# Altium PCB Arduino_MEGA_2560-Rev3.PcbDoc (part 1 of 2)
Units mm, origin at the board's own origin, x right, y up, seen from the top; angles counter-clockwise.
Board outline 101.6 x 53.34 mm, 2 copper layers (Top, Bottom); 63 components, 112 nets, 394 pads, 154 vias.
Unrouted connection lines stored in the file: 1.
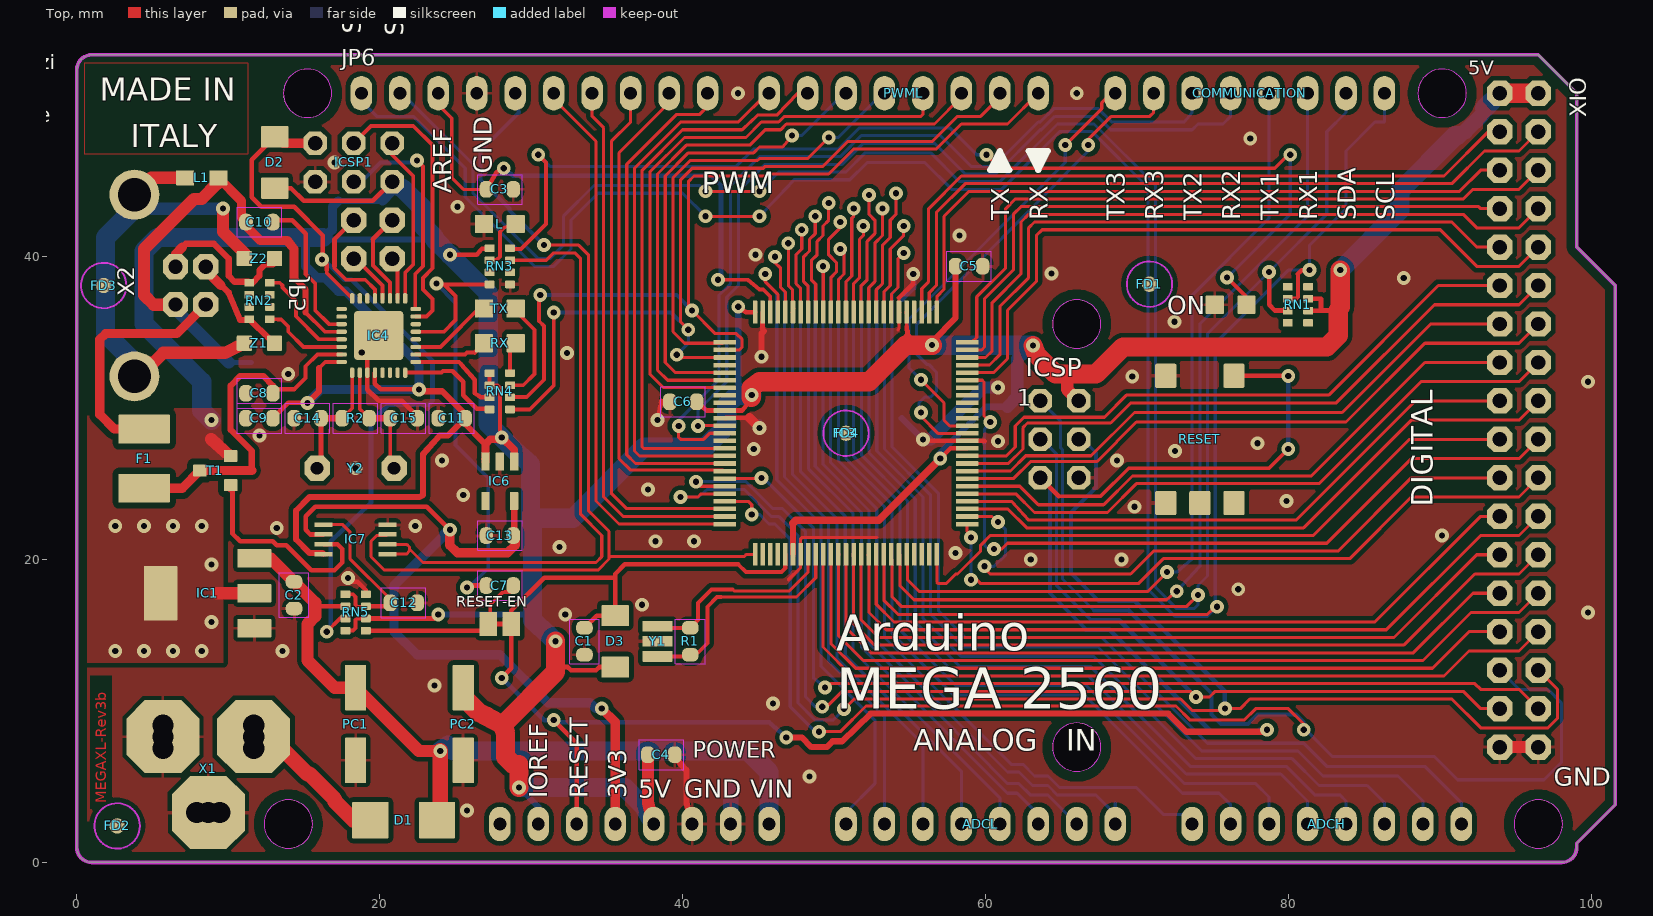
[diagram p0: Top view]
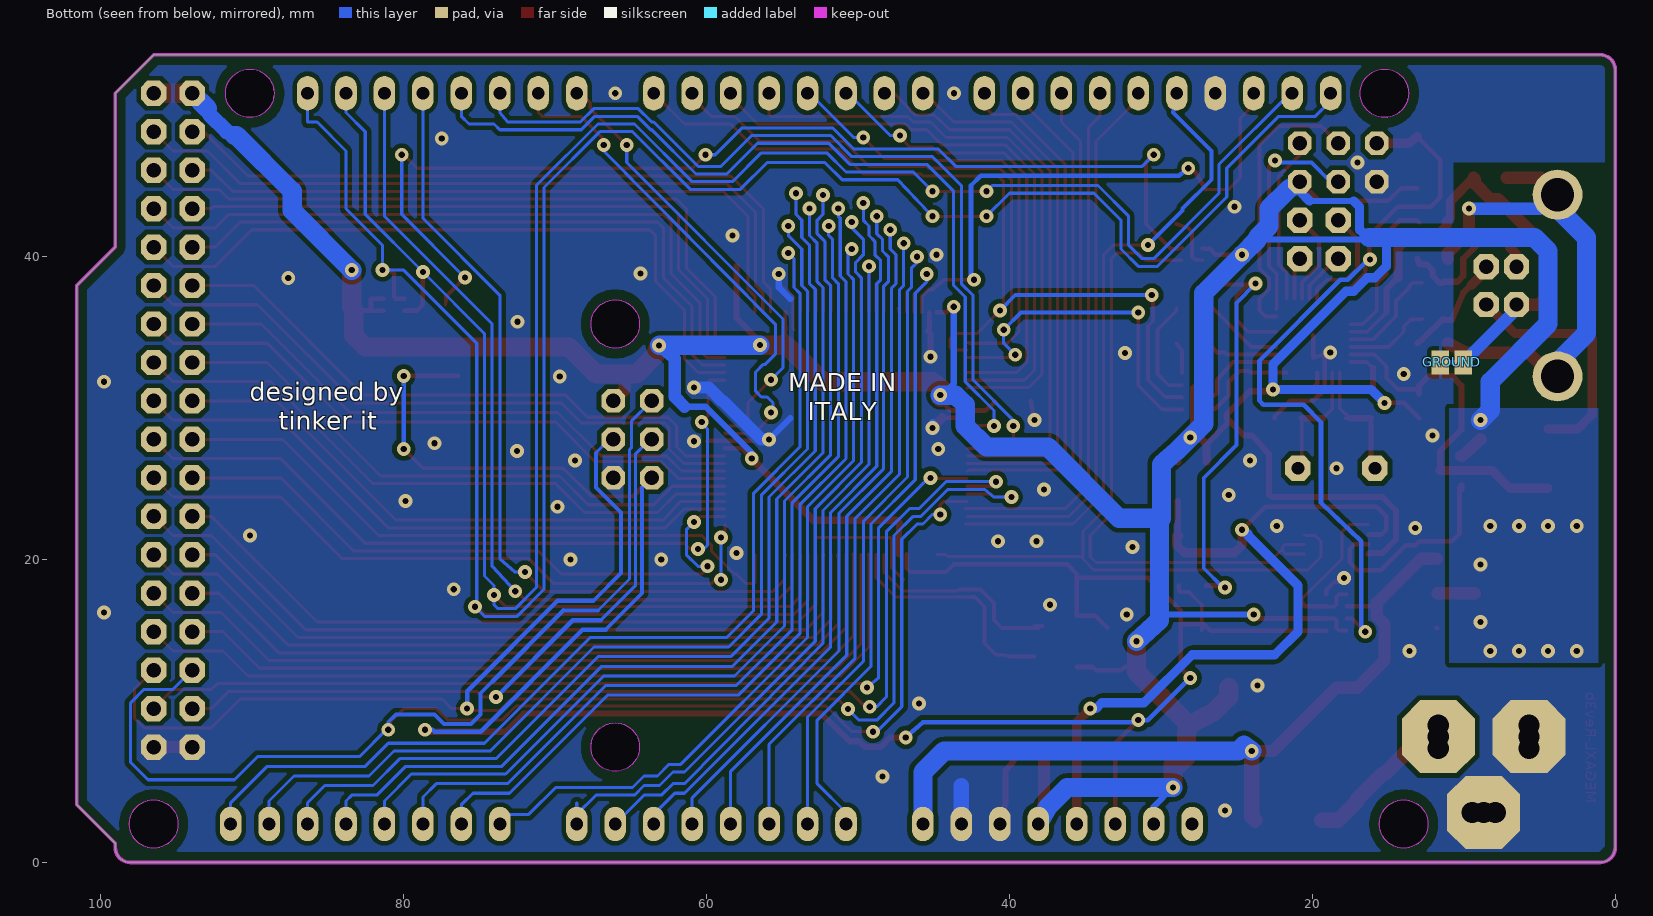
[diagram p1: Bottom view, seen from below]

## Layer stack, top to bottom
Top Solder: solder mask 0.0102, Solder Resist, Dk 3.5
Top: signal copper 0.035
Dielectric 1: dielectric 0.32, FR-4, Dk 4.8
Bottom: signal copper 0.035
Bottom Solder: solder mask 0.0102, Solder Resist, Dk 3.5

## Board outline
96.52,53.34 99.06,50.8 99.06,40.64 101.6,38.1 101.6,3.81 99.06,1.27 99.06,1 cw(c98.06,1) 98.06,0 1,0 cw(c1,1) 0,1 0,52.34 cw(c1,52.34) 1,53.34
cut-out: 13.97,0.94 ccw(c13.97,2.54) 15.57,2.54 ccw(c13.97,2.54) 13.97,4.14 ccw(c13.97,2.54) 12.37,2.54 ccw(c13.97,2.54)
cut-out: 66.04,33.96 ccw(c66.04,35.56) 67.64,35.56 ccw(c66.04,35.56) 66.04,37.16 ccw(c66.04,35.56) 64.44,35.56 ccw(c66.04,35.56)
cut-out: 66.04,6.02 ccw(c66.04,7.62) 67.64,7.62 ccw(c66.04,7.62) 66.04,9.22 ccw(c66.04,7.62) 64.44,7.62 ccw(c66.04,7.62)
cut-out: 96.52,0.94 ccw(c96.52,2.54) 98.12,2.54 ccw(c96.52,2.54) 96.52,4.14 ccw(c96.52,2.54) 94.92,2.54 ccw(c96.52,2.54)
cut-out: 15.24,49.2 ccw(c15.24,50.8) 16.84,50.8 ccw(c15.24,50.8) 15.24,52.4 ccw(c15.24,50.8) 13.64,50.8 ccw(c15.24,50.8)
cut-out: 90.17,49.2 ccw(c90.17,50.8) 91.77,50.8 ccw(c90.17,50.8) 90.17,52.4 ccw(c90.17,50.8) 88.57,50.8 ccw(c90.17,50.8)

## Design rules (kind name [scope] priority, off if disabled: settings)
BoardOutlineClearance mdCopperDimension [All] p1: gap=0.254 ignorepadtopadclearanceinfootprint=FALSE except(0: Arc-SplitContinuation Track-SplitContinuation SMDPad-SplitContinuation THPad-SplitContinuation Via-SplitContinuation Fill-SplitContinuation Poly-SplitContinuation Region-SplitContinuation Text-SplitContinuation; 0.686: Poly-OutlineEdge Poly-CavityEdge Poly-CutoutEdge Poly-SplitBarrior)
Clearance Clearance_for_PolygonClass_Isolate_16 [InPolygonClass('Isolate_16') vs IsArc Or IsTrack Or IsPad Or IsVia Or IsFill Or IsRegion Or IsText] p1: gap=0.406 ignorepadtopadclearanceinfootprint=FALSE
Clearance Clearance_for_PolygonClass_Isolate_12 [InPolygonClass('Isolate_12') vs IsArc Or IsTrack Or IsPad Or IsVia Or IsFill Or IsRegion Or IsText] p2: gap=0.305 ignorepadtopadclearanceinfootprint=FALSE
Clearance "Clearance (Same Net)" [All] p3: gap=0.178 ignorepadtopadclearanceinfootprint=FALSE
Clearance "Clearance_for_NetClass_power usb" [InNetClass('power usb') vs InNetClass('power usb')] p4: gap=0.203 ignorepadtopadclearanceinfootprint=FALSE
Clearance Clearance_for_NetClass_gnd [InNetClass('gnd') vs InNetClass('gnd')] p5: gap=0.203 ignorepadtopadclearanceinfootprint=FALSE
Clearance Clearance_for_NetClass_power [InNetClass('power') vs InNetClass('power')] p6: gap=0.203 ignorepadtopadclearanceinfootprint=FALSE
Clearance [All] p7: gap=0.178 ignorepadtopadclearanceinfootprint=FALSE except(0.203: Track-Via THPad-THPad; 0.254: Via-Via; 0.305: THPad-Via)
HoleSize "HoleSize_For_NetClass_power usb" [InNetClass('power usb')] p1: absolutevalues=TRUE maxlimit=0.406 minlimit=0.406 maxpercent=80.000 minpercent=20.000
HoleSize HoleSize_For_NetClass_gnd [InNetClass('gnd')] p2: absolutevalues=TRUE maxlimit=0.406 minlimit=0.406 maxpercent=80.000 minpercent=20.000
HoleSize HoleSize_For_NetClass_power [InNetClass('power')] p3: absolutevalues=TRUE maxlimit=0.406 minlimit=0.406 maxpercent=80.000 minpercent=20.000
HoleSize [All] p4: absolutevalues=TRUE maxlimit=2540 minlimit=0.406 maxpercent=80.000 minpercent=20.000
HoleToHoleClearance mdDrill [All] p1: gap=0.305 allowstackedmicrovias=TRUE
MinimumSolderMaskSliver [All] p1 off: minsoldermaskwidth=0.254
PasteMaskExpansion Expansion_SMDPaste_OFF [InPadClass('SMDPaste_OFF')] p1: expansion=0
PasteMaskExpansion mlMinCreamFrame [All] p2: expansion=-0.051
PolygonConnect PolygonConnect_For_PolygonThermal_ON_Width80000_Gap100000 [InPolygonClass('PolygonThermal_ON_Width80000_Gap100000') vs Not IsVia] p1: connectstyle=Relief reliefconductorwidth=0.203 reliefentries=4 polygonreliefangle="90 Angle" airgapwidth=0.254
PolygonConnect PolygonConnect_For_PolygonThermal_ON_Width120000_Gap100000 [InPolygonClass('PolygonThermal_ON_Width120000_Gap100000') vs Not IsVia] p2: connectstyle=Relief reliefconductorwidth=0.305 reliefentries=4 polygonreliefangle="90 Angle" airgapwidth=0.254
PolygonConnect PolygonConnect_For_PolygonThermal_OFF [InPolygonClass('PolygonThermal_OFF')] p3: connectstyle=Direct reliefconductorwidth=0.254 reliefentries=4 polygonreliefangle="90 Angle" airgapwidth=0.254
PolygonConnect ThermalVias [IsVia] p4: connectstyle=Direct reliefconductorwidth=0.254 reliefentries=4 polygonreliefangle="90 Angle" airgapwidth=0.254
PolygonConnect [All] p5: connectstyle=Relief reliefconductorwidth=0.254 reliefentries=4 polygonreliefangle="90 Angle" airgapwidth=0.254
RoutingVias [All] p1: holewidth=0.406 width=0.914 viastyle="Through Hole" minholewidth=0.406 minwidth=0.914 maxholewidth=2.54 maxwidth=2.54
SolderMaskExpansion Expansion_SMDSolder_OFF [InPadClass('SMDSolder_OFF')] p1: expansion=0 istentingtop=FALSE
SolderMaskExpansion mlMinStopFrame [All] p2: expansion=0.051 istentingtop=FALSE
Width "Width_For_NetClass_power usb" [InNetClass('power usb')] p1: maxlimit=1.016 minlimit=0.254 preferedwidth=0.508
Width Width_For_NetClass_gnd [InNetClass('gnd')] p2: maxlimit=0.61 minlimit=0.254 preferedwidth=0.305
Width Width_For_NetClass_power [InNetClass('power')] p3: maxlimit=1.219 minlimit=0.254 preferedwidth=0.61
Width [All] p4: maxlimit=0.254 minlimit=0.203 preferedwidth=0.203
26 further rules are at their usual default settings.

## Classes and differential pairs
polygon class PolygonThermal_ON_Width80000_Gap100000: Polygon_1_Net_GND Polygon_1_Net_N$1 Polygon_2_Net_GND
polygon class PolygonThermal_ON_Width120000_Gap100000: Polygon_2_Net_+5V
polygon class PolygonThermal_OFF: Polygon_1_Net_+5V
polygon class Isolate_16: Polygon_1_Net_+5V
polygon class Isolate_12: Polygon_1_Net_GND Polygon_2_Net_GND
pad class SMDSolder_OFF: IC4-33
pad class SMDPaste_OFF: IC4-33 RESET-5
net class "power usb": +5V USBVCC XVCC
net class gnd: GND UGND USHIELD
net class power: +3V3 PWRIN VIN

## Components (designator, comment, footprint, x,y, rotation, side; value= is the part's Value field where it differs from the comment)
ADCH "8x1F-H8.5" 1X08 82.55,2.54 r0 top
ADCL "8x1F-H8.5" 1X08 59.69,2.54 r0 top
C1 "22p" C0603-ROUND 33.528,14.605 r270 top
C2 "100n" C0603-ROUND 14.351,17.653 r270 top
C3 "100n" C0603-ROUND 27.94,44.45 r0 top
C4 "100n" C0603-ROUND 38.608,7.112 r0 top
C5 "100n" C0603-ROUND 58.928,39.37 r0 top
C6 "100n" C0603-ROUND 40.045,30.419 r180 top
C7 "100n" C0603-ROUND 27.94,18.288 r0 top
C8 "100n" C0603-ROUND 12.065,30.988 r180 top
C9 "100n" C0603-ROUND 12.065,29.337 r180 top
C10 "1u" C0603-ROUND 12.065,42.291 r180 top
C11 "100n" C0603-ROUND 24.765,29.337 r0 top
C12 "100n" C0603-ROUND 21.59,17.145 r180 top
C13 "1u" C0603-ROUND 27.94,21.59 r0 top
C14 "22p" C0603-ROUND 15.24,29.337 r180 top
C15 "22p" C0603-ROUND 21.59,29.337 r0 top
COMMUNICATION "8x1F-H8.5" 1X08 77.47,50.8 r180 top
D1 "M7" SMB 21.59,2.794 r180 top
D2 "CD1206-S01575" MINIMELF 13.081,46.228 r90 top
D3 "CD1206-S01575" MINIMELF 35.56,14.605 r90 top
F1 "MF-MSMF050-2 500mA" L1812 4.445,26.67 r90 top
FD1 "" FIDUCIA-MOUNT 70.841,38.192 r0 top
FD2 "" FIDUCIA-MOUNT 2.667,2.413 r0 top
FD3 "" FIDUCIA-MOUNT 1.778,38.1 r0 top
FD4 "" FIDUCIA-MOUNT 50.8,28.346 r0 top
GROUND "" SJ 10.795,33.02 r0 bottom
IC1 "NCP1117ST50T3G" SOT223 8.636,17.78 r90 top
IC3 "ATMEGA2560-16AU" TQFP100 50.8,28.346 r0 top
IC4 "ATMEGA16U2-MU" MLF32 19.939,34.798 r90 top
IC6 "LP2985-33DBVR" SOT23-DBV 27.94,25.171 r180 top
IC7 "LMV358IDGKR" MSOP08 18.415,21.336 r90 top
ICSP "3x2M" 2X03 64.897,27.94 r270 top
ICSP1 "3x2M" 2X03 18.288,46.228 r180 top
JP5 "2x2M - NM" 2X02 19.558,41.148 r90 top
JP6 "10x1F-H8.5" 1X10 30.226,50.8 r0 top
L "YELLOW" CHIP-LED0805 27.94,42.164 r90 top
L1 "BLM21" 0805 8.255,45.212 r180 top
ON "GREEN" CHIP-LED0805 76.2,36.83 r90 top
PC1 "47u" PANASONIC_D 18.415,9.144 r90 top
PC2 "47u" PANASONIC_D 25.527,9.144 r90 top
POWER "8x1F-H8.5" 1X08 36.83,2.54 r0 top
PWML "8x1F-H8.5" 1X08 54.61,50.8 r180 top
R1 "1M" R0603-ROUND 40.513,14.605 r90 top
R2 "1M" R0603-ROUND 18.415,29.337 r0 top
RESET "TS42031-160R-TR-7260" TS42 74.168,27.94 r90 top
RESET-EN "" SJ 27.94,15.748 r0 top
RN1 "10K" CAT16 80.645,36.83 r270 top
RN2 "22R" CAY16 12.065,37.084 r90 top
RN3 "1k" CAY16 27.94,39.37 r270 top
RN4 "1k" CAY16 27.94,31.115 r90 top
RN5 "10K" CAT16 18.415,16.51 r90 top
RX "YELLOW" CHIP-LED0805 27.94,34.29 r90 top
T1 "FDN340P" SOT-23 9.144,25.908 r270 top
TX "YELLOW" CHIP-LED0805 27.94,36.576 r90 top
U$1 "" DISCLAIMER -19.9,-21 r0 top
X1 "POWERSUPPLY_DC21MMX" POWERSUPPLY_DC-21MM 5.334,8.382 r90 top
X2 "USB-B_TH" PN61729 3.81,38.1 r270 top
XIO "18x2F-H8.5" 2X18 95.25,29.21 r270 top
Y1 "CSTCE16M0V53-R0 16MHZ" RESONATOR 38.354,14.605 r270 top
Y2 "16MHz" QS 18.415,26.035 r180 top
Z1 "CG0603MLC-05E" CT/CN0603 12.065,34.29 r0 top
Z2 "CG0603MLC-05E" CT/CN0603 12.065,39.878 r0 top

## Footprints (in the part's own frame and the unit in brackets; to place one, negate y for a bottom-side part, rotate by r counter-clockwise, add the part's x,y. Pads: shape width x height; smd on the part's side, far side on the other; paste and mask are expansions set on the pad)
1X08 [mil] "1X08"
  oval 56x89.6 hole 33.46: 1(-350,0) 2(-250,0) 3(-150,0) 4(-50,0) 5(50,0) 6(150,0) 7(250,0) 8(350,0)
1X10 [mil] "1X10"
  oval 56x89.6 hole 33.46: 1(-450,0) 2(-350,0) 3(-250,0) 4(-150,0) 5(-50,0) 6(50,0) 7(150,0) 8(250,0) 9(350,0) 10(450,0)
2X02 [mil] "2X02"
  oct 66x66 / inner round 60.98 / far side oct 66x66 hole 37.4: 1(-50,-50) 2(-50,50) 3(50,-50) 4(50,50)
2X03 [mm] "2X03"
  oct 1.55x1.55 / inner round 1.432 / far side oct 1.55x1.55 hole 0.95: 1(-2.54,-1.27) 2(-2.54,1.27) 3(0,-1.27) 4(0,1.27) 5(2.54,-1.27) 6(2.54,1.27)
2X18 [mil] "2X18"
  oct 66x66 / inner round 60.98 / far side oct 66x66 hole 37.4: 1(-850,-50) 2(-850,50) 3(-750,-50) 4(-750,50) 5(-650,-50) 6(-650,50) 7(-550,-50) 8(-550,50) 9(-450,-50) 10(-450,50) 11(-350,-50) 12(-350,50) 13(-250,-50) 14(-250,50) 15(-150,-50) 16(-150,50) 17(-50,-50) 18(-50,50) 19(50,-50) 20(50,50) 21(150,-50) 22(150,50) 23(250,-50) 24(250,50) 25(350,-50) 26(350,50) 27(450,-50) 28(450,50) 29(550,-50) 30(550,50) 31(650,-50) 32(650,50) 33(750,-50) 34(750,50) 35(850,-50) 36(850,50)
0805 [mm] "0805"
  rrect10% 1.2x1 smd: 1(-1.1,0) 2(1.1,0)
C0603-ROUND [mil] "C0603-ROUND"
  rrect80% 35.37x43.31 smd: 1(-35,0) 2(35,0)
  Top keep-out lines w2: 57.99,-38.7 -57.99,-38.7 -57.99,38.7 57.99,38.7 57.99,-38.7
CAT16 [mm] "CAT16"
  rrect20% 0.5x0.65 smd: 1(-1.2,-0.675) 2(-0.4,-0.675) 3(0.4,-0.675) 4(1.2,-0.675) 5(1.2,0.675) 6(0.4,0.675) 7(-0.4,0.675) 8(-1.2,0.675)
CAY16 [mm] "CAY16"
  rrect20% 0.5x0.65 smd: 1(-1.2,-0.675) 2(-0.4,-0.675) 3(0.4,-0.675) 4(1.2,-0.675) 5(1.2,0.675) 6(0.4,0.675) 7(-0.4,0.675) 8(-1.2,0.675)
CHIP-LED0805 [mm] "CHIP-LED0805"
  rrect8% 1.2x1.2 smd: A(0,-1.05) C(0,1.05)
CT/CN0603 [mm] "CT/CN0603"
  rrect10% 1x1 smd: 1(-1,0) 2(1,0)
DISCLAIMER [mm] "DISCLAIMER"
FIDUCIA-MOUNT [mil] "FIDUCIA-MOUNT"
  rrect100% 40x40 smd: P$1(0,0)
  Top keep-out circle w5: c0,0 r59.06
L1812 [mm] "L1812"
  rrect5% 1.9x3.4 smd: 1(-1.95,0) 2(1.95,0)
MINIMELF [mm] "MINIMELF"
  rrect7% 1.4x1.8 smd: A(1.7,0) C(-1.7,0)
MLF32 [mm] "MLF32"
  rrect80% 0.7x0.28 smd: 1(-2.45,1.75) 2(-2.45,1.25) 3(-2.45,0.75) 4(-2.45,0.25) 5(-2.45,-0.25) 6(-2.45,-0.75) 7(-2.45,-1.25) 8(-2.45,-1.75) 17(2.45,-1.75) 18(2.45,-1.25) 19(2.45,-0.75) 20(2.45,-0.25) 21(2.45,0.25) 22(2.45,0.75) 23(2.45,1.25) 24(2.45,1.75)
  rrect80% 0.28x0.7 smd: 9(-1.75,-2.45) 10(-1.25,-2.45) 11(-0.75,-2.45) 12(-0.25,-2.45) 13(0.25,-2.45) 14(0.75,-2.45) 15(1.25,-2.45) 16(1.75,-2.45) 25(1.75,2.45) 26(1.25,2.45) 27(0.75,2.45) 28(0.25,2.45) 29(-0.25,2.45) 30(-0.75,2.45) 31(-1.25,2.45) 32(-1.75,2.45)
  rrect15% 3.254x3.254 smd paste+0 mask+0: 33(0,0)
MSOP08 [mm] "MSOP08"
  rrect20% 0.3x1.2 smd: 1(-0.976,-2.113) 2(-0.326,-2.113) 3(0.324,-2.113) 4(0.974,-2.113) 5(0.974,2.112) 6(0.324,2.112) 7(-0.326,2.112) 8(-0.976,2.112)
PANASONIC_D [mm] "PANASONIC_D"
  rrect7% 3x1.4 smd: +(2.4,0) -(-2.4,0)
PN61729 [mil] "PN61729"
  oct 66x66 / inner round 60.98 / far side oct 66x66 hole 37.4: 1(49.21,185.43) 2(-49.21,185.43) 3(-49.21,106.69) 4(49.21,106.69)
  round 129.91 hole 86.61: P$1(-236.22,0) P$2(236.22,0)
POWERSUPPLY_DC-21MM [mil] "POWERSUPPLY_DC-21MM"
  oct 190x190 / inner round 175.54 / far side oct 190x190 hole 55.12: 1(-200,-132) 2(-3,-250) 3(-3,-14)
  round 82.68 hole 55.12: 4(-200,-162) 5(-200,-102) 6(-33,-14) 7(27,-14) 8(-33,-250) 9(27,-250)
QS [mil] "QS"
  oct 66x66 / inner round 60.98 / far side oct 66x66 hole 33.46: 1(-100,0) 2(100,0)
R0603-ROUND [mil] "R0603-ROUND"
  rrect80% 35.37x43.31 smd: 1(-35,0) 2(35,0)
  Top keep-out lines w2: -57.99,38.7 -57.99,-38.7 57.99,-38.7 57.99,38.7 -57.99,38.7
RESONATOR [mm] "RESONATOR"
  rrect14% 0.7x2 smd: 1(-1,0) 2(0,0) 3(1,0)
SJ [mil] "SJ"
  rrect8% 46x63 smd: 1(-30,0) 2(30,0)
SMB [mm] "SMB"
  rrect4% 2.4x2.4 smd: A(2.2,0) C(-2.2,0)
SOT23-DBV [mm] "SOT23-DBV"
  rrect18% 0.55x1.2 smd: 1(-0.95,-1.3) 2(0,-1.3) 3(0.95,-1.3) 4(0.95,1.3) 5(-0.95,1.3)
SOT223 [mil] "SOT223"
  rrect8% 48x88 smd: 1(-91,-122) 2(0,-122) 3(91,-122)
  rrect4% 141.73x86.61 smd: 4(0,122.01)
SOT-23 [mil] "SOT-23"
  rrect12% 31x35 smd: 1(1,-40) 2(-37,40) 3(39,40)
TQFP100 [mm] "TQFP100"
  rrect20% 1.5x0.3 smd: 1(-8,6) 2(-8,5.5) 3(-8,5) 4(-8,4.5) 5(-8,4) 6(-8,3.5) 7(-8,3) 8(-8,2.5) 9(-8,2) 10(-8,1.5) 11(-8,1) 12(-8,0.5) 13(-8,0) 14(-8,-0.5) 15(-8,-1) 16(-8,-1.5) 17(-8,-2) 18(-8,-2.5) 19(-8,-3) 20(-8,-3.5) 21(-8,-4) 22(-8,-4.5) 23(-8,-5) 24(-8,-5.5) 25(-8,-6) 51(8,-6) 52(8,-5.5) 53(8,-5) 54(8,-4.5) 55(8,-4) 56(8,-3.5) 57(8,-3) 58(8,-2.5) 59(8,-2) 60(8,-1.5) 61(8,-1) 62(8,-0.5) 63(8,0) 64(8,0.5) 65(8,1) 66(8,1.5) 67(8,2) 68(8,2.5) 69(8,3) 70(8,3.5) 71(8,4) 72(8,4.5) 73(8,5) 74(8,5.5) 75(8,6)
  rrect20% 0.3x1.5 smd: 26(-6,-8) 27(-5.5,-8) 28(-5,-8) 29(-4.5,-8) 30(-4,-8) 31(-3.5,-8) 32(-3,-8) 33(-2.5,-8) 34(-2,-8) 35(-1.5,-8) 36(-1,-8) 37(-0.5,-8) 38(0,-8) 39(0.5,-8) 40(1,-8) 41(1.5,-8) 42(2,-8) 43(2.5,-8) 44(3,-8) 45(3.5,-8) 46(4,-8) 47(4.5,-8) 48(5,-8) 49(5.5,-8) 50(6,-8) 76(6,8) 77(5.5,8) 78(5,8) 79(4.5,8) 80(4,8) 81(3.5,8) 82(3,8) 83(2.5,8) 84(2,8) 85(1.5,8) 86(1,8) 87(0.5,8) 88(0,8) 89(-0.5,8) 90(-1,8) 91(-1.5,8) 92(-2,8) 93(-2.5,8) 94(-3,8) 95(-3.5,8) 96(-4,8) 97(-4.5,8) 98(-5,8) 99(-5.5,8) 100(-6,8)
TS42 [mm] "TS42"
  rrect15% 1.6x1.4 smd: 1(-4.2,2.25) 2(4.2,2.25) 3(-4.2,-2.25) 4(4.2,-2.25)
  rrect15% 1.6x1.4 smd paste+0: 5(-4.2,0)

## Part data
ADCH ADCL COMMUNICATION POWER PWML: library part 1X08, PackageName=1X08
C1 C2 C3 C4 C5 C6 C7 C8 C9 C10 C11 C12 C13 C14 C15: library part C0603-ROUND, PackageName=C0603-ROUND
D1: library part SMB, PackageName=SMB
D2 D3: library part MINIMELF, PackageName=MINIMELF
F1: library part L1812, PackageName=L1812
FD1 FD2 FD3 FD4: library part FIDUCIA-MOUNT, PackageName=FIDUCIA-MOUNT
GROUND RESET-EN: library part SJ, PackageName=SJ
IC1: library part SOT223, PackageName=SOT223
IC3: library part TQFP100, PackageName=TQFP100
IC4: library part MLF32, PackageName=MLF32
IC6: library part SOT23-DBV, PackageName=SOT23-DBV
IC7: library part MSOP08, PackageName=MSOP08
ICSP ICSP1: library part 2X03, PackageName=2X03
JP5: library part 2X02, PackageName=2X02
JP6: library part 1X10, PackageName=1X10
L ON RX TX: library part CHIP-LED0805, PackageName=CHIP-LED0805
L1: library part 0805, PackageName=0805
PC1 PC2: library part PANASONIC_D, PackageName=PANASONIC_D
R1 R2: library part R0603-ROUND, PackageName=R0603-ROUND
RESET: library part TS42, PackageName=TS42
RN1 RN5: library part CAT16, PackageName=CAT16
RN2 RN3 RN4: library part CAY16, PackageName=CAY16
T1: library part SOT-23, PackageName=SOT-23
U$1: library part DISCLAIMER, PackageName=DISCLAIMER
X1: library part POWERSUPPLY_DC-21MM, PackageName=POWERSUPPLY_DC-21MM
X2: library part PN61729, PackageName=PN61729
XIO: library part 2X18, PackageName=2X18
Y1: library part RESONATOR, PackageName=RESONATOR
Y2: library part QS, PackageName=QS
Z1 Z2: library part CT/CN0603, PackageName=CT/CN0603

## Free pads (board coordinates)
  round 3.2 hole 3.2 unplated: MH1(96.52,2.54) MH2(15.24,50.8) MH3(90.17,50.8) MH4(13.97,2.54) MH5(66.04,35.56) MH6(66.04,7.62)

## Via types
v1: diameter 0.914/0.914 (per signal layer), hole 0.406, Top to Bottom, 154 vias

## Nets (pads, with @x,y where several pads share a name; then routed paths per layer and width w, separated by ;. In a path a pad name is that pad's centre, name@x,y a point inside that pad or via, vN(x,y) a via of type N, cw(c..) or ccw(c..) an arc to the next point about the centre after c; other vN are vias at no path point)
5-GND: RESET.5
8PB4: IC4.18 JP5.1 | length 3
  Top w0.254: JP5.1@20.574,39.878 JP5.1@20.828,39.878 21.189,39.517 IC4.18@21.189,37.248
8PB5: IC4.19 JP5.3 | length 6.2
  Top w0.254: 19.558,41.148 19.558,39.421 20.689,38.29 IC4.19@20.689,37.248
  Top w0.305: 19.558,41.148 JP5.3@20.828,42.418
8PB6: IC4.20 JP5.2 | length 3.5
  Top w0.254: JP5.2@18.288,39.878 18.415,39.878 20.189,38.104 IC4.20@20.189,37.248
8PB7: IC4.21 JP5.4 | length 7.5
  Top w0.254: 17.018,39.37 17.018,39.243 17.78,38.481 19.05,38.481 19.685,37.846 19.685,37.252 IC4.21@19.689,37.248
  Top w0.305: 17.018,39.37 17.018,41.148 JP5.4@18.288,42.418
+3V3: C13.2 IC6.5 IC7.6 POWER.4 | length 53.5
  Top w0.305: IC7.6@16.303,21.66 15.424,21.66 15.113,21.971 15.113,22.86 15.748,23.495 23.114,23.495 v1(24.638,21.971)
  Top w0.406: C13.2@28.89,21.617 IC6.5@28.89,23.871
  Top w0.61: v1(24.638,21.971) 24.638,20.955 25.146,20.447 28.448,20.447 28.956,20.955 28.956,21.551 C13.2@28.829,21.59 C13.2@28.89,21.617 ; v1(34.671,10.16) 35.56,9.271 POWER.4@35.56,2.54
  Bottom w0.61: v1(24.638,21.971) 24.257,21.717 24.257,21.59 20.955,18.288 20.955,15.24 22.479,13.716 27.94,13.716 31.115,10.541 33.909,10.541 34.29,10.16 v1(34.671,10.16)
+5V: C4.1 C5.1 C6.1 C9.1 C11.2 D2.C D3.C IC1.2 IC1.4 IC3.10 IC3.31 IC3.61 IC3.80 IC3.100 IC4.4 IC4.32 IC6.1 IC6.3 IC7.8 ICSP1.2 ICSP.2 PC2.+ POWER.2 POWER.5 RN1.6 RN1.7 RN3.1 RN4.5 RN4.6 RN5.2 RN5.8 T1.2 XIO.1 XIO.2 | length 345.6
  Top w0.254: 16.002,32.639 16.411,33.048 IC4.32@17.489,33.048 ; RN5.8@17.74,15.31 18.231,15.31 18.415,15.494 18.415,16.002 18.523,16.11 RN5.2@19.09,16.11 ; RN4.5@27.265,32.315 RN4.6@27.265,31.515 27.794,31.515 27.94,31.369 27.94,28.639 28.003,28.194 v1(28.067,28.067) ; IC3.80@54.8,36.346 54.812,36.296 54.788,36.271 54.813,36.246 54.813,35.408 ; 57.658,27.305 57.699,27.346
  Top w0.305: C9.1@12.954,29.337 13.97,30.353 v1(15.24,30.353) ; D2.C@13.081,44.528 14.146,44.528 14.986,43.688 19.558,43.688 ICSP1.2@20.828,44.958 ; RN5.2@19.09,16.11 23.603,16.11 v1(23.876,16.383) ; IC4.4@19.689,32.348 19.689,31.619 20.066,31.242 v1(22.606,31.242) ; v1(24.638,40.132) 26.416,40.132 26.738,40.513 RN3.1@27.265,40.57 ; 31.623,13.208 31.926,12.905 32.434,12.905 32.639,12.7 34.29,12.7 34.495,12.905 D3.C@35.56,12.905 ; C6.1@40.934,30.419 41.595,29.847 IC3.10@42.8,29.847 43.944,29.847 v1@44.45,30.48 ; v1(43.688,36.703) 44.172,36.346 IC3.100@44.8,36.346 ; 54.813,35.408 54.813,35.154 54.864,35.103 54.864,34.671 ; v1(57.023,26.67) 57.658,27.305 ; 57.699,27.346 IC3.61@58.8,27.346 ; RN1.6@81.32,36.43 82.15,36.43 82.169,36.449 ; RN1.7@81.32,37.23 82.15,37.23 82.169,37.211 82.169,36.449 ; 83.312,36.449 82.169,36.449
  Top w0.406: v1(15.24,30.353) 16.002,31.115 16.002,32.639 ; IC7.8@16.303,20.36 16.216,20.447 15.367,20.447 14.478,21.336 14.478,23.241 15.367,24.13 22.606,24.13 22.86,24.257 22.86,26.963 23.964,28.194 24.511,28.194 C11.2@25.654,29.337 ; v1(22.606,31.242) 22.733,31.115 24.13,31.115 25.654,29.591 C11.2@25.654,29.337 ; 26.99,27.625 25.527,29.088 C11.2@25.654,29.337 ; v1@44.546,30.703 44.45,30.48 v1(44.577,30.861) ; IC3.31@47.3,20.346 47.3,22.408 ; v1(56.49,34.163) 56.49,34.392 56.515,34.417 58.039,35.966 C5.1@58.039,39.37
  Top w0.508: IC6.3@26.96,26.67 IC6.3@26.99,26.471 26.99,27.625 27.305,27.94 v1@27.94,27.94 ; v1(28.067,28.067) 28.89,27.244 IC6.1@28.89,26.471 ; 47.3,22.408 47.498,22.606 52.959,22.606 v1(57.023,26.67)
  Top w0.61: v1@27.94,27.94 v1(28.067,28.067) ; 54.864,34.671 54.864,34.29 54.991,34.163
  Top w0.813: 8.89,27.94 10.109,26.848 T1.2@10.16,26.848 ; 9.271,17.78 IC1.2@11.735,17.78 ; C4.1@37.719,7.112 37.719,3.937 POWER.5@38.1,2.54 ; 65.405,32.258 65.405,31.242 ICSP.2@66.167,30.48 ; 83.312,34.798 83.312,34.925
  Top w1.27: PC2.+@25.527,11.544 25.527,10.922 26.543,9.906 27.051,9.652 28.13,9.08 ; v1(29.21,4.953) 29.21,6.477 28.829,6.477 28.321,6.985 28.321,8.509 28.13,9.08 ; v1(31.623,14.605) 31.623,13.208 31.623,12.573 28.13,9.08 ; v1@44.546,30.703 44.546,31.338 45.085,31.75 52.324,31.75 54.737,34.163 54.991,34.163 v1(56.49,34.163) ; v1(63.144,34.138) 63.373,33.528 64.643,32.258 65.405,32.258 67.31,32.258 69.088,34.036 82.55,34.036 83.312,34.798 ; 83.312,34.925 83.312,36.449 83.439,36.703 v1(83.439,39.116) ; XIO.1@93.98,50.8 XIO.2@96.52,50.8
  Bottom w0.406: 16.256,41.275 16.637,41.275 16.764,41.148 23.495,41.148 ; 17.272,43.688 20.193,43.688 ; v1(23.876,16.383) 30.099,16.383 ; v1(29.21,4.953) 30.48,3.683 POWER.2@30.48,2.54 ; v1(43.688,36.703) 43.688,31.623 44.577,30.734 v1(44.577,30.861) ; v1(57.023,26.67) 57.023,27.051 60.071,30.099 61.468,30.099
  Bottom w0.61: 15.113,41.275 15.113,39.37 15.875,38.608 16.383,38.608 17.272,37.719 17.78,37.719 22.606,32.893 v1(22.606,31.242) 16.129,31.242 v1(15.24,30.353) ; 16.256,41.275 16.891,41.783 16.891,43.307 17.272,43.688 ; 20.193,43.688 20.828,44.323 ICSP1.2@20.828,44.958 ; 23.495,41.148 23.622,41.275 ; v1@63.119,34.163 v1(63.144,34.138)
  Bottom w0.813: 61.468,30.099 62.103,30.734 62.103,33.274 v1(63.144,34.138)
  Bottom w1.016: 91.186,48.006 91.694,48.26 92.837,49.403 92.964,49.784
  Bottom w1.27: v1(8.89,29.21) 8.255,29.845 8.255,31.75 4.445,35.56 4.445,40.386 5.334,41.275 15.113,41.275 16.256,41.275 ; ICSP1.2@20.828,44.958 20.955,44.831 21.59,44.45 22.86,43.18 22.86,42.037 23.622,41.275 23.622,41.148 v1(24.638,40.132) 27.178,37.592 27.178,28.956 v1(28.067,28.067) 28.956,27.178 29.972,26.289 29.972,22.733 30.099,22.733 ; v1(29.21,4.953) 36.195,4.953 37.465,3.683 POWER.5@38.1,2.54 ; v1(31.623,14.605) 30.099,16.002 30.099,16.383 30.099,22.733 ; v1(44.577,30.861) 43.561,30.861 42.926,30.226 42.926,28.829 41.529,27.432 37.465,27.432 32.766,22.733 30.099,22.733 ; v1(56.49,34.163) v1@63.119,34.163 ; v1(83.439,39.116) 87.376,43.053 87.376,44.323 91.059,48.006 91.186,48.006 ; 92.964,49.784 XIO.1@93.98,50.8
  other v1: 2.54,13.97 4.445,13.97 6.35,13.97 8.255,13.97 8.89,15.875 8.89,19.685 2.54,22.225 4.445,22.225 6.35,22.225 8.255,22.225
ADC0: ADCL.1 IC3.97 | length 43
  Top w0.203: v1(45.466,38.862) 45.466,38.354 46.3,37.52 IC3.97@46.3,36.346
  Bottom w0.203: v1(45.466,38.862) 45.466,38.354 46.228,37.592 46.228,25.273 49.149,22.352 49.149,12.954 52.705,9.398 52.705,5.207 50.8,3.302 ADCL.1@50.8,2.54
ADC1: ADCL.2 IC3.96 | length 44.4
  Top w0.203: v1(46.101,40.005) 46.101,39.624 46.482,39.243 46.482,37.973 46.8,37.655 IC3.96@46.8,36.346
  Bottom w0.203: v1(46.101,40.005) 46.101,39.624 46.482,39.243 46.482,37.973 46.736,37.719 46.736,25.451 49.632,22.555 49.632,13.31 53.34,9.601 ADCL.2@53.34,2.54
ADC2: ADCL.3 IC3.95 | length 46.9
  Top w0.203: v1(46.99,40.894) 46.99,38.1 47.269,37.821 47.269,36.678 47.371,36.576 47.3,36.505 47.3,36.378 IC3.95@47.268,36.346 ; IC3.95@47.244,36.322 IC3.95@47.268,36.346 ; IC3.95@47.3,36.346 IC3.95@47.268,36.346
  Bottom w0.203: v1(46.99,40.894) 46.99,38.1 47.269,37.821 47.269,25.629 50.216,22.682 50.216,13.462 55.88,7.798 ADCL.3@55.88,2.54
ADC3: ADCL.4 IC3.94 | length 49.7
  Top w0.203: IC3.94@47.8,36.346 47.8,37.925 47.498,38.227 47.498,40.132 47.879,40.513 v1(47.879,41.783)
  Bottom w0.203: v1(47.879,41.783) 47.879,40.513 47.498,40.132 47.498,38.227 47.752,37.973 47.803,37.846 47.803,25.806 50.749,22.86 50.749,13.691 58.42,6.02 58.42,3.15 58.522,3.048 58.522,2.845 58.42,2.743 ADCL.4@58.42,2.54
ADC4: ADCL.5 IC3.93 | length 52.7
  Top w0.203: IC3.93@48.3,36.346 48.3,38.06 48.006,38.354 48.006,40.005 48.387,40.386 48.387,41.148 48.768,41.529 v1(48.768,42.672)
  Bottom w0.203: v1(48.768,42.672) 48.768,41.529 48.387,41.148 48.387,40.386 48.006,40.005 48.006,38.354 48.311,38.049 48.311,26.01 51.257,23.063 51.257,13.97 60.96,4.267 ADCL.5@60.96,2.54 ADCL.5@60.96,2.438
ADC5: ADCL.6 IC3.92 | length 55.9
  Top w0.203: IC3.92@48.8,36.346 48.8,38.195 48.514,38.481 48.514,39.751 48.895,40.132 48.895,41.021 49.276,41.402 49.276,42.037 49.657,42.418 v1(49.657,43.561)
  Bottom w0.203: v1(49.657,43.561) 49.657,42.418 49.276,42.037 49.276,41.402 48.895,41.021 48.895,40.132 48.514,39.751 48.514,38.481 48.768,38.227 48.768,26.162 51.816,23.114 51.816,14.224 61.468,4.572 62.103,4.572 63.5,3.175 ADCL.6@63.5,2.54
ADC6: ADCL.7 IC3.91 | length 47.9
  Top w0.203: v1(49.276,39.37) 49.3,39.346 IC3.91@49.3,36.346
  Bottom w0.203: v1(49.276,39.37) 49.276,26.289 52.324,23.241 52.324,14.478 61.468,5.207 62.23,5.207 62.992,4.445 64.135,4.445 ADCL.7@66.04,2.54
ADC7: ADCL.8 IC3.90 | length 58.1
  Top w0.203: IC3.90@49.8,36.346 49.8,38.624 50.165,38.989 50.165,39.624 49.657,40.132 49.657,41.148 50.419,41.91 v1(50.419,42.291)
  Bottom w0.203: v1(50.419,42.291) 50.419,41.91 49.657,41.148 49.657,40.132 50.165,39.624 50.165,38.989 49.784,38.608 49.784,26.416 52.832,23.368 52.832,14.605 61.468,5.969 62.23,5.969 63.119,5.08 64.135,5.08 64.77,4.445 67.31,4.445 ADCL.8@68.58,3.175 ; ADCL.8@68.58,2.54 ADCL.8@68.58,3.175 ; 68.58,3.937 ADCL.8@68.58,3.175
ADC8: ADCH.1 IC3.89 | length 57.4
  Top w0.203: IC3.89@50.3,36.346 50.3,38.489 50.673,38.862 50.673,40.259 v1(50.419,40.513)
  Bottom w0.203: v1(50.419,40.513) 50.673,40.259 50.673,38.862 50.292,38.481 50.292,26.543 53.34,23.495 53.34,14.859 61.722,6.477 62.484,6.477 63.246,5.715 64.135,5.715 64.897,4.953 69.977,4.953 71.755,3.175 73.66,3.175 ADCH.1@73.66,2.54
ADC9: ADCH.2 IC3.88 | length 64.9
  Top w0.203: IC3.88@50.8,36.346 50.8,38.354 51.181,38.735 51.181,42.545 51.308,42.672 v1(51.308,43.18)
  Bottom w0.203: v1(51.308,43.18) 51.308,42.672 51.181,42.545 51.181,38.735 50.8,38.354 50.8,26.67 53.848,23.622 53.848,15.113 57.912,11.049 66.548,11.049 73.025,4.572 75.438,4.572 76.2,3.81 ADCH.2@76.2,2.54
ADC10: ADCH.3 IC3.87 | length 64.9
  Top w0.203: IC3.87@51.3,36.346 51.3,38.219 51.689,38.608 51.689,41.148 51.943,41.402 v1(51.943,42.037)
  Bottom w0.203: v1(51.943,42.037) 51.943,41.402 51.689,41.148 51.689,38.608 51.308,38.227 51.308,26.797 54.356,23.749 54.356,15.367 58.039,11.684 66.675,11.684 73.152,5.207 77.851,5.207 78.74,4.318 ADCH.3@78.74,2.54
ADC11: ADCH.4 IC3.86 | length 71.2
  Top w0.203: IC3.86@51.8,36.346 51.8,38.084 52.197,38.481 52.197,41.021 52.705,41.529 52.705,42.418 52.324,42.799 v1(52.324,44.069)
  Bottom w0.203: v1(52.324,44.069) 52.324,42.799 52.705,42.418 52.705,41.529 52.197,41.021 52.197,38.481 51.816,38.1 51.816,26.924 54.864,23.876 54.864,15.621 58.166,12.319 66.802,12.319 73.279,5.842 79.502,5.842 81.28,4.064 ADCH.4@81.28,2.54
ADC12: ADCH.5 IC3.85 | length 71
  Top w0.203: IC3.85@52.3,36.346 52.3,37.949 52.705,38.354 52.705,40.894 53.213,41.402 v1(53.213,43.18)
  Bottom w0.203: v1(53.213,43.18) 53.213,41.402 52.705,40.894 52.705,38.354 52.324,37.973 52.324,27.051 55.372,24.003 55.372,15.875 58.293,12.954 66.929,12.954 73.533,6.35 79.883,6.35 81.788,4.445 83.439,4.445 83.82,4.064 ADCH.5@83.82,2.54
ADC13: ADCH.6 IC3.84 | length 75.2
  Top w0.203: IC3.84@52.8,36.346 52.8,37.814 53.213,38.227 53.213,40.767 53.721,41.275 53.721,42.418 54.102,42.799 v1(54.102,44.196)
  Bottom w0.203: v1(54.102,44.196) 54.102,42.799 53.721,42.418 53.721,41.275 53.213,40.767 53.213,38.227 52.832,37.846 52.832,27.178 55.88,24.13 55.88,16.129 58.42,13.589 67.183,13.589 73.914,6.858 80.264,6.858 82.042,5.08 85.217,5.08 86.36,3.937 ADCH.6@86.36,2.54
ADC14: ADCH.7 IC3.83 | length 72.8
  Top w0.203: IC3.83@53.3,36.346 53.3,37.679 53.721,38.1 53.721,40.513 54.61,41.402 v1(54.61,42.037)
  Bottom w0.203: v1(54.61,42.037) 54.61,41.402 53.721,40.513 53.721,38.1 53.34,37.719 53.34,27.305 56.388,24.257 56.388,16.383 58.547,14.224 67.437,14.224 74.295,7.366 80.645,7.366 82.296,5.715 87.249,5.715 88.9,4.064 ADCH.7@88.9,2.54
ADC15: ADCH.8 IC3.82 | length 70.6
  Top w0.203: IC3.82@53.8,36.346 53.8,37.544 54.229,37.973 54.229,39.878 v1(54.61,40.259)
  Bottom w0.203: v1(54.61,40.259) 54.229,39.878 54.229,37.973 53.848,37.592 53.848,27.432 56.896,24.384 56.896,16.637 58.674,14.859 67.691,14.859 74.676,7.874 81.026,7.874 82.55,6.35 89.027,6.35 91.44,3.937 ADCH.8@91.44,2.54
AREF: C3.1 IC3.98 JP6.3 | length 36.4
  Top w0.203: JP6.3@23.876,50.8 23.876,50.038 24.765,49.149 24.765,45.212 25.527,44.45 C3.1@27.051,44.45
  Top w0.254: v1(42.342,38.481) 44.323,38.481 45.085,37.846 45.339,37.846 45.8,37.385 IC3.98@45.8,36.346
  Top w0.305: C3.1@27.051,44.45 27.725,45.593 v1(28.194,45.847)
  Bottom w0.305: v1(28.194,45.847) 28.829,45.339 41.91,45.339 42.545,44.704 42.545,38.659 v1(42.342,38.481)
CMP: C12.2 IC7.5 RN5.3 RN5.5 | length 12.2
  Top w0.203: IC7.5@16.303,22.31 17.568,22.31 18.034,21.844 18.034,20.066 20.701,17.399 C12.2@20.701,17.145
  Top w0.254: RN5.5@17.74,17.71 18.231,17.71 18.415,17.526 18.415,17.018 18.542,16.891 RN5.3@19.071,16.891
  Top w0.305: RN5.3@19.071,16.891 RN5.3@19.09,16.91 ; 19.87,16.91 RN5.3@19.09,16.91 ; C12.2@20.701,17.145 20.466,16.91 RN5.3@19.09,16.91
D+: RN2.5 X2.3 Z2.2 | length 10.4
  Top w0.406: 6.985,40.64 7.2,40.855 9.056,40.855 10.033,39.878 10.033,38.735 10.414,38.354 11.32,38.354 RN2.5@11.39,38.284 11.614,38.284 12.065,38.735 12.065,39.116 12.446,39.497 12.938,39.497 Z2.2@13.065,39.878
  Top w0.61: X2.3@6.52,39.35 6.52,40.175 6.985,40.64
D-: RN2.8 X2.2 Z1.2 | length 7.3
  Top w0.406: 9.525,38.1 9.564,38.1 10.033,37.631 10.033,37.592 10.795,35.814 11.32,35.814 RN2.8@11.39,35.884 12.73,34.544 Z1.2@13.065,34.29
  Top w0.61: X2.2@8.52,39.35 8.529,39.096 9.525,38.1
DTR: C7.1 IC4.13 RN3.4 | length 32.6
  Top w0.254: IC4.13@22.389,35.048 24.253,35.048 25.019,35.814 25.019,37.408 24.257,38.17 ; v1(23.749,38.227) 23.806,38.17 24.257,38.17 ; RN3.4@27.265,38.17 24.257,38.17
  Top w0.305: v1(25.781,18.161) 26.035,18.288 C7.1@27.051,18.288
  Bottom w0.254: v1(23.749,38.227) 25.019,36.957 25.019,27.559 27.178,25.4 27.178,19.431 25.908,18.161 v1(25.781,18.161)
GATE_CMD: IC7.7 T1.3 | length 14.2
  Top w0.305: T1.3@10.16,24.917 10.287,24.79 10.287,21.717 10.795,21.209 12.954,21.209 13.208,20.955 13.843,20.955 15.494,19.304 17.018,19.304 17.526,19.812 17.526,20.701 17.217,21.01 IC7.7@16.303,21.01
  Top w0.406: T1.3@10.16,24.638 T1.3@10.16,24.917
GND: C1.2 C2.2 C3.2 C4.2 C5.2 C6.2 C8.2 C9.2 C11.1 C12.1 C13.1 C14.2 C15.2 GROUND.2 IC1.1 IC3.11 IC3.32 IC3.62 IC3.81 IC3.99 IC4.3 IC4.33 IC6.2 IC7.4 ICSP1.6 ICSP.6 JP6.4 L.C ON.C PC1.- PC2.- POWER.6 POWER.7 RESET.1 RESET.2 RN3.5 RN5.4 X1.1 X1.3 X1.4 X1.5 X1.6 X1.7 XIO.35 XIO.36 Y1.2 | length 58.3
  Top w0.203: 46.99,18.669 47.803,19.482 IC3.32@47.803,20.349 ; IC3.32@47.8,20.346 IC3.32@47.803,20.349 ; 52.832,21.463 47.879,21.463 47.803,21.387 IC3.32@47.803,20.349 ; 54.229,35.179 54.3,35.25 IC3.81@54.3,36.346 IC3.81@54.332,36.346 ; 54.3,37.282 54.3,36.378 IC3.81@54.332,36.346 ; IC3.81@54.356,36.322 IC3.81@54.332,36.346
  Top w0.305: IC1.1@11.735,15.469 IC1.1@11.811,15.494 ; v1(17.907,18.796) 18.161,18.542 18.542,18.542 19.09,17.994 RN5.4@19.09,17.71 ; IC4.3@19.187,32.332 19.187,33.325 v1(18.821,33.68) ; IC4.3@19.189,32.348 19.189,31.23 19.939,30.48 21.463,30.48 22.479,29.464 C15.2@22.479,29.337 ; IC4.33@19.189,33.313 v1(18.821,33.68) ; IC4.33@19.234,33.68 v1(18.821,33.68) ; IC4.33@19.939,34.798 19.939,33.325 v1(18.821,33.68) ; v1(38.354,29.226) 38.608,30.48 ; IC3.11@42.8,29.346 42.859,29.346 42.875,29.362 44.323,29.362 ; 44.399,29.362 44.323,29.362 ; 44.425,29.362 44.348,29.362 44.323,29.337 44.323,29.362 ; IC3.99@45.3,36.346 45.288,35.204 45.39,35.103 ; 54.3,37.282 55.245,38.227 v1(55.245,38.862) ; v1@56.058,27.864 56.083,27.838 IC3.62@58.808,27.838 ; IC3.62@58.826,27.838 58.819,27.847 IC3.62@58.8,27.846 IC3.62@58.808,27.838 ; 59.944,27.813 59.919,27.838 IC3.62@58.808,27.838
  Top w0.406: C4.2@39.497,7.112 39.878,6.477 40.259,6.096 40.259,3.937 POWER.6@40.64,2.54 ; v1(45.212,33.401) 45.212,34.925 45.39,35.103 ; v1(55.88,27.94) 56.007,27.813 v1@56.058,27.864
  Top w0.61: 44.425,29.362 v1(45.085,28.702) ; v1@55.88,27.813 v1(55.88,27.94)
  Top w0.813: XIO.35@93.98,7.62 XIO.36@96.52,7.62
  Bottom w0.305: 10.16,33.02 GROUND.2@11.557,33.02
  Bottom w0.406: v1(45.085,28.702) v1@45.085,29.083 ; 54.483,29.337 v1(55.88,27.94) ; 54.483,37.211 55.245,37.973 v1(55.245,38.862)
  Bottom w0.813: v1(55.88,27.94) 56.388,27.94 58.928,30.48 58.979,30.48 59.868,31.369 v1(60.833,31.369) ; XIO.35@93.726,7.874 XIO.35@93.98,7.62
  Bottom w1.016: POWER.7@43.18,2.54 43.18,5.08
  other v1: 25.781,3.429 48.387,5.667 45.974,10.493 23.622,11.684 13.589,13.97 32.258,16.383 99.806,16.51 37.338,17.018 76.708,18.042 63,20 69,20 58.039,20.447 31.877,20.828 38.227,21.209 40.767,21.209 90.17,21.59 13.208,22.098 22.352,22.225 69.85,23.495 79.883,23.876 25.527,24.257 37.719,24.638 18.415,26.035 24.13,26.543 68.707,26.543 72.517,27.178 44.704,27.305 77.978,27.686 60.833,27.813 12.065,28.194 99.806,31.75 69.706,32.097 13.97,32.258 32.385,33.655 72.492,35.712 87.63,38.608 64.364,38.887 44.831,40.132 58.293,41.402 25.146,43.307 17.018,46.228 77.495,47.803 43.672,50.8 66.04,50.8
L13: IC7.1 IC7.2 RN3.7 | length 41.8
  Top w0.203: IC7.1@20.528,20.36 21.804,20.36 21.971,20.574 21.971,20.701 ; IC7.2@20.528,21.01 21.789,21.01 21.971,20.828 21.971,20.701 ; RN3.7@28.615,39.77 31.007,39.77 31.496,40.259 32.893,40.259 33.274,39.878 33.274,22.987 34.671,21.59 34.671,20.193 34.29,19.812 22.86,19.812 21.971,20.701
M8RXD: IC4.9 RN4.7 | length 6.4
  Top w0.254: IC4.9@22.389,33.048 25.245,33.048 25.4,32.893 ; RN4.7@27.246,30.734 RN4.7@27.265,30.715
  Top w0.305: 25.4,32.893 26.289,31.877 26.289,30.988 26.67,30.734 RN4.7@27.246,30.734
M8TXD: IC4.8 RN4.8 | length 7.2
  Top w0.254: IC4.8@21.689,32.348 24.096,32.348 24.195,32.447 24.83,32.447
  Top w0.305: 24.83,32.447 25.527,31.75 25.527,30.861 26.416,29.972 27.208,29.972 RN4.8@27.265,29.915
MISO2: IC4.17 ICSP1.1 | length 11.1
  Top w0.254: ICSP1.1@20.828,47.498 20.828,46.736 22.225,45.339 22.225,39.497 21.689,38.961 IC4.17@21.689,37.248